# EAGLE board MOL-v1.1-2 (EAGLE 8.2.2)

Size 165.08 x 80.95 mm. Coordinates in mm from the lower left corner, seen from the top.
Outline: 0,0 165.08,0 165.08,80.95 0,80.95 0,0
Copper layers (1*16): Top 0.035559375mm / dielectric 1.501140625mm / Bottom 0.035559375mm
Design rules "typical_4pcb": minimum track width 10mil, minimum drill 15mil, track to track 6mil, track to pad 6mil, pad to pad 6mil, via to via 6mil, smd to smd 6mil, copper to edge 15mil, drill to drill 8mil, minimum pad ring 10mil, minimum via ring 8mil, stop-mask expansion 4mil, vias tented up to drill 0mil, thermal gap 10mil
Net classes: 2 Power: width 0.381 mm, clearance 0.279 mm; 3 Analog Sig: width 0.381 mm, clearance 0.279 mm

## Footprints (pad centres in the part's own frame; a part is rotated, then mirrored left to right if it is on the bottom)
1X03_NO_SILK = drill 1.016 pad 1.524: 1 0,0; 2 2.54,0; 3 5.08,0
1X02_LOCK = drill 1.016 pad 1.88: 1 -0.178,0; 2 2.718,0
1X04_LOCK = drill 1.016 pad 1.88 square: 1 0,0.127 | drill 1.016 pad 1.88: 2 2.54,-0.127; 3 5.08,0.127; 4 7.62,-0.127
DIL18 = drill 0.813 long: 1 -10.16,-3.81; 2 -7.62,-3.81; 3 -5.08,-3.81; 4 -2.54,-3.81; 5 0,-3.81; 6 2.54,-3.81; 7 5.08,-3.81; 8 7.62,-3.81; 9 10.16,-3.81; 10 10.16,3.81; 11 7.62,3.81; 12 5.08,3.81; 13 2.54,3.81; 14 0,3.81; 15 -2.54,3.81; 16 -5.08,3.81; 17 -7.62,3.81; 18 -10.16,3.81
SOT23-6 = smd 0.55 x 1.2: 1 -0.95,-1.3; 2 0,-1.3; 3 0.95,-1.3; 4 0.95,1.3; 5 0,1.3; 6 -0.95,1.3
1X03_LOCK@1 = drill 1.016 pad 1.88: 1 0,0.127; 2 2.54,-0.127; 3 5.08,0.127
1X05_LOCK = drill 1.016 pad 1.88: 1 0,0.127; 2 2.54,-0.127; 3 5.08,0.127; 4 7.62,-0.127; 5 10.16,0.127
TRIM-PCB-9MM = drill 0.9 pad 1.778: 1 -2.54,-7.5; 2 0,-7.5; 3 2.54,-7.5 | drill 2.845 pad 4: 5 -4.8,0; M2 4.8,0
SPRINGTERMINAL-2.54MM-4 = drill 1.1 pad 1.9: 1 7.62,-2.54; 2 5.08,-2.54; 3 2.54,-2.54; 4 0,-2.54; P$1 7.62,2.54; P$2 5.08,2.54; P$3 2.54,2.54; P$4 0,2.54
DCJACK_2MM_PTH = drill 2.8: GND 0,7.35; GNDBREAK 4.8,10.75 | drill 3.2: PWR 0,13.6
1/6W-RES = drill 0.762 pad 1.676: 1 -2.5,0; 2 2.5,0
RESISTOR-NET-8P-DIL16 = drill 0.813 pad 1.422: A1 -8.89,-3.81; A2 -8.89,3.81; B1 -6.35,-3.81; B2 -6.35,3.81; C1 -3.81,-3.81; C2 -3.81,3.81; D1 -1.27,-3.81; D2 -1.27,3.81; E1 1.27,-3.81; E2 1.27,3.81; F1 3.81,-3.81; F2 3.81,3.81; G1 6.35,-3.81; G2 6.35,3.81; H1 8.89,-3.81; H2 8.89,3.81
TR2-SWITCH-MOMENTARY-LED = drill 0.8 pad 1.676: 1 2.54,-2.54; 2 2.54,2.54; 3 -2.54,-2.54; 4 -2.54,2.54; A 0,2.54; C 0,-2.54
T36 = drill 1: 0 -15.24,-5.08; 1 -12.7,-5.08; 2 -10.16,-5.08; 3 -7.62,-5.08; 3V3(1) 17.78,-5.08; 3V3(2) 27.94,0; 3V3(3) -12.7,10.16; 3V3(4) 40.64,5.08; 4 -5.08,-5.08; 5 -2.54,-5.08; 5V -11.43,-1.905; 6 0,-5.08; 7 2.54,-5.08; 8 5.08,-5.08; 9 7.62,-5.08; 10 10.16,-5.08; 11 12.7,-5.08; 12 15.24,-5.08; 13 15.24,10.16; 14 12.7,10.16; 15 10.16,10.16; 16 7.62,10.16; 17 5.08,10.16; 18 2.54,10.16; 19 0,10.16; 20 -2.54,10.16; 21 -5.08,10.16; 22 -7.62,10.16; 23 -10.16,10.16; 24 20.32,-5.08; 25 22.86,-5.08; 26 25.4,-5.08; 27 27.94,-5.08; 28 30.48,-5.08; 29 33.02,-5.08; 30 35.56,-5.08; 31 38.1,-5.08; 32 40.64,-5.08; 33 40.64,10.16; 34 38.1,10.16; 35 35.56,10.16; 36 33.02,10.16; 37 30.48,10.16; 38 27.94,10.16; 39 25.4,10.16; 40 20.32,2.54; 41 22.86,2.54; 42 25.4,2.54; 43 30.48,2.54; 44 33.02,2.54; 45 35.56,2.54; 46 38.1,2.54; 47 38.1,5.08; 48 35.56,5.08; 49 33.02,5.08; 50 30.48,5.08; 51 25.4,5.08; 52 22.86,5.08; 53 20.32,5.08; 54 5.08,5.08; 55 2.54,5.08; 56 0,5.08; 57 -2.54,5.08; A10 -7.62,7.62; A11 -5.08,7.62; AGND -15.24,10.16; AREF -10.16,7.62; D+ -6.35,-1.905; D- -8.89,-1.905; DAC0 22.86,10.16; DAC1 20.32,10.16; DC 2.54,2.54; DD 5.08,2.54; DE 0,2.54; G1 27.94,2.54; G2 17.78,10.16; G3 40.64,2.54; G4 -3.81,-1.905; G5 -1.27,-1.905; G6 -2.54,2.54; P 27.94,5.08; R 27.94,7.62; VBAT 27.94,-2.54; VIN -17.78,10.16; VUSB -15.24,7.62 | drill 1 square: G0 -17.78,-5.08
POLOLU_TB6612FNG = drill 0.8 pad 1.778: AIN1 7.62,3.81; AIN2 7.62,6.35; AO1 -7.62,3.81; AO2 -7.62,1.27; BIN1 7.62,-1.27; BIN2 7.62,-3.81; BO1 -7.62,-3.81; BO2 -7.62,-1.27; GND -7.62,8.89; GND1 -7.62,-8.89; GND2 7.62,-8.89; PWMA 7.62,8.89; PWMB 7.62,-6.35; STBY 7.62,1.27; VCC -7.62,6.35; VMOT -7.62,-6.35

## Placement (x,y rotation side)
AN-IN-1  [1X03_NO_SILK]  11.05,77.34 0 top
AN-IN-2  [1X03_NO_SILK]  22.61,77.34 0 top
AN-IN-3  [1X03_NO_SILK]  34.04,77.34 0 top
AN-IN-4  [1X03_NO_SILK]  45.47,77.34 0 top
AN-IN-5  [1X03_NO_SILK]  64.39,77.34 0 top
AN-IN-6  [1X03_NO_SILK]  75.95,77.34 0 top
AN-IN-7  [1X03_NO_SILK]  87.38,77.34 0 top
AN-IN-8  [1X03_NO_SILK]  98.81,77.34 0 top
AN-IN-9  [1X03_NO_SILK]  179.96,77.34 0 top  (outside the outline)
AN-IN-10  [1X03_NO_SILK]  191.52,77.34 0 top  (outside the outline)
AN-IN-11  [1X03_NO_SILK]  202.95,77.34 0 top  (outside the outline)
AN-IN-12  [1X03_NO_SILK]  214.38,77.34 0 top  (outside the outline)
GND-SHRT  [1X02_LOCK]  156.08,17.78 270 bottom
I2C  [1X04_LOCK]  162.56,50.8 270 bottom
IC1  ULN2803  [DIL18]  16.51,27.94 0 bottom
IC2  ULN2803  [DIL18]  101.6,8.89 0 bottom
IC3  SN74LVC2G04DBV  [SOT23-6]  142.24,38.1 270 bottom
J1  SERVO 1  [1X03_LOCK@1]  153.67,21.59 90 top
J2  SERVO 2  [1X03_LOCK@1]  158.12,21.59 90 top
J3  SERVO 3  [1X03_LOCK@1]  162.56,21.59 90 top
J4  SERVO 1  [1X03_LOCK@1]  -1.27,-26.67 0 top  (outside the outline)
J5  SERVO 2  [1X03_LOCK@1]  -1.27,-45.72 0 top  (outside the outline)
JOY1  [1X05_LOCK]  2.54,62.23 90 top
JOY2  [1X05_LOCK]  162.56,72.39 270 top
KNOB1  [TRIM-PCB-9MM]  13.59,70.99 0 top
KNOB2  [TRIM-PCB-9MM]  25.15,61.21 0 top
KNOB3  [TRIM-PCB-9MM]  36.58,70.99 0 top
KNOB4  [TRIM-PCB-9MM]  48.01,61.21 0 top
KNOB5  [TRIM-PCB-9MM]  66.93,70.99 0 top
KNOB6  [TRIM-PCB-9MM]  78.49,61.21 0 top
KNOB7  [TRIM-PCB-9MM]  89.92,70.99 0 top
KNOB8  [TRIM-PCB-9MM]  101.35,61.21 0 top
KNOB9  [TRIM-PCB-9MM]  182.5,70.99 0 top  (outside the outline)
KNOB10  [TRIM-PCB-9MM]  194.06,61.21 0 top  (outside the outline)
KNOB11  [TRIM-PCB-9MM]  205.49,70.99 0 top  (outside the outline)
KNOB12  [TRIM-PCB-9MM]  216.92,61.21 0 top  (outside the outline)
MOTORS1  [SPRINGTERMINAL-2.54MM-4]  157.48,37.59 270 bottom
POWER-5V  [DCJACK_2MM_PTH]  167.64,7.62 270 bottom
R5  [1/6W-RES]  156.59,45.72 180 bottom
R6  [1/6W-RES]  156.59,43.31 180 bottom
RN1  330  [RESISTOR-NET-8P-DIL16]  40.64,27.94 0 bottom
RN2  330  [RESISTOR-NET-8P-DIL16]  102.87,20.32 0 bottom
S1  SW-LEDPTH  [TR2-SWITCH-MOMENTARY-LED]  13.59,45.72 0 top
S2  SW-LEDPTH  [TR2-SWITCH-MOMENTARY-LED]  25.4,45.72 0 top
S3  SW-LEDPTH  [TR2-SWITCH-MOMENTARY-LED]  36.83,45.72 0 top
S4  SW-LEDPTH  [TR2-SWITCH-MOMENTARY-LED]  48.26,45.72 0 top
S5  SW-LEDPTH  [TR2-SWITCH-MOMENTARY-LED]  66.93,45.72 0 top
S6  SW-LEDPTH  [TR2-SWITCH-MOMENTARY-LED]  78.74,45.72 0 top
S7  SW-LEDPTH  [TR2-SWITCH-MOMENTARY-LED]  90.17,45.72 0 top
S8  SW-LEDPTH  [TR2-SWITCH-MOMENTARY-LED]  101.6,45.72 0 top
S9  SW-LEDPTH  [TR2-SWITCH-MOMENTARY-LED]  182.5,45.72 0 top  (outside the outline)
S10  SW-LEDPTH  [TR2-SWITCH-MOMENTARY-LED]  194.31,45.72 0 top  (outside the outline)
S11  SW-LEDPTH  [TR2-SWITCH-MOMENTARY-LED]  205.74,45.72 0 top  (outside the outline)
S12  SW-LEDPTH  [TR2-SWITCH-MOMENTARY-LED]  217.17,45.72 0 top  (outside the outline)
TEENSY  TEENSY3_6--ALLPINS  [T36]  19.05,15.24 180 bottom
U$7  POLOLU_TB6612FNG  [POLOLU_TB6612FNG]  142.24,31.75 0 bottom
US1  SW-LEDPTH  [TR2-SWITCH-MOMENTARY-LED]  88.9,34.29 180 top
US2  SW-LEDPTH  [TR2-SWITCH-MOMENTARY-LED]  97.79,34.29 180 top
US3  SW-LEDPTH  [TR2-SWITCH-MOMENTARY-LED]  106.68,34.29 180 top
US4  SW-LEDPTH  [TR2-SWITCH-MOMENTARY-LED]  115.57,34.29 180 top
VIN  [1X02_LOCK]  163.7,17.78 270 bottom
VOUT  [1X02_LOCK]  161.16,17.78 270 bottom

## Library data of the parts
AN-IN-1-AN-IN-12 J1-J5 JOY1 JOY2 = SparkFun-Connectors
GND-SHRT I2C MOTORS1 RN1 RN2 U$7 VIN VOUT = CMU-ArtFab
IC1 IC2 = uln-udn
IC3 = 74LV
KNOB1-KNOB12 S1-S12 US1-US4 = Daniel
POWER-5V = adafruit
R5 R6 = SparkFun-Resistors
TEENSY = Teensy_3_6

## Nets
+3V3: AN-IN-1.1 AN-IN-2.1 AN-IN-3.1 AN-IN-4.1 AN-IN-5.1 AN-IN-6.1 AN-IN-7.1 AN-IN-8.1 AN-IN-9.1 AN-IN-10.1 AN-IN-11.1 AN-IN-12.1 I2C.1 IC3.5 JOY1.2 JOY2.2 KNOB1.1 KNOB2.1 KNOB3.1 KNOB4.1 KNOB5.1 KNOB6.1 KNOB7.1 KNOB8.1 KNOB9.1 KNOB10.1 KNOB11.1 KNOB12.1 R5.1 R6.1 TEENSY.3V3(1) TEENSY.3V3(2) TEENSY.3V3(3) TEENSY.3V3(4) U$7.STBY U$7.VCC
+5V [Power]: IC1.10 IC2.10 J1.2 J2.2 J3.2 J4.2 J5.2 POWER-5V.PWR VIN.1
AGND [Analog Sig]: AN-IN-1.3 AN-IN-2.3 AN-IN-3.3 AN-IN-4.3 AN-IN-5.3 AN-IN-6.3 AN-IN-7.3 AN-IN-8.3 AN-IN-9.3 AN-IN-10.3 AN-IN-11.3 AN-IN-12.3 JOY1.1 JOY2.1 KNOB1.3 KNOB2.3 KNOB3.3 KNOB4.3 KNOB5.3 KNOB6.3 KNOB7.3 KNOB8.3 KNOB9.3 KNOB10.3 KNOB11.3 KNOB12.3 TEENSY.AGND
AN1 [Analog Sig]: AN-IN-1.2 AN-IN-5.2 AN-IN-9.2 KNOB1.2 KNOB5.2 KNOB9.2 TEENSY.14
AN2 [Analog Sig]: AN-IN-2.2 AN-IN-6.2 AN-IN-10.2 KNOB2.2 KNOB6.2 KNOB10.2 TEENSY.15
AN3 [Analog Sig]: AN-IN-3.2 AN-IN-7.2 AN-IN-11.2 KNOB3.2 KNOB7.2 KNOB11.2 TEENSY.16
AN4 [Analog Sig]: AN-IN-4.2 AN-IN-8.2 AN-IN-12.2 KNOB4.2 KNOB8.2 KNOB12.2 TEENSY.33
AN5 [Analog Sig]: TEENSY.34
AN6 [Analog Sig]: TEENSY.35
AN7 [Analog Sig]: TEENSY.36
AN8 [Analog Sig]: TEENSY.39
AN9 [Analog Sig]: TEENSY.DAC0
AN10 [Analog Sig]: TEENSY.DAC1
AN11 [Analog Sig]: TEENSY.A10
AN12 [Analog Sig]: TEENSY.A11
B1: S1.1 S5.1 S9.1 TEENSY.11
B2: S2.1 S6.1 S10.1 TEENSY.12
B3: S3.1 S7.1 S11.1 TEENSY.24
B4: S4.1 S8.1 S12.1 TEENSY.25
B5: TEENSY.26
B6: TEENSY.27
B7: TEENSY.28
B8: TEENSY.42
B9: TEENSY.43
B10: TEENSY.44
B11: TEENSY.45
B12: TEENSY.46
GND: GND-SHRT.2 I2C.2 IC1.9 IC2.9 IC3.2 J1.1 J2.1 J3.1 J4.1 J5.1 S1.3 S2.3 S3.3 S4.3 S5.3 S6.3 S7.3 S8.3 S9.3 S10.3 S11.3 S12.3 TEENSY.G0 TEENSY.G1 TEENSY.G2 TEENSY.G3 TEENSY.G4 TEENSY.G5 TEENSY.G6 U$7.GND US1.3 US2.3 US3.3 US4.3 VIN.2 VOUT.2
GND_MOT [Power]: GND-SHRT.1 POWER-5V.GND U$7.GND1 U$7.GND2
GNDBREAK: POWER-5V.GNDBREAK
I2C_SCL: I2C.3 R5.2
I2C_SDA: I2C.4 R6.2
JOYB1: JOY1.5 TEENSY.1
JOYB2: JOY2.5 TEENSY.0
JOYH1 [Analog Sig]: JOY1.3 TEENSY.20
JOYH2 [Analog Sig]: JOY2.3 TEENSY.18
JOYV1 [Analog Sig]: JOY1.4 TEENSY.19
JOYV2 [Analog Sig]: JOY2.4 TEENSY.17
L1: IC1.8 TEENSY.2
L2: IC1.7 TEENSY.3
L3: IC1.6 TEENSY.4
L4: IC1.5 TEENSY.5
L5: IC1.4 TEENSY.6
L6: IC1.3 TEENSY.7
L7: IC1.2 TEENSY.8
L8: IC1.1 TEENSY.23
L9: IC2.8 TEENSY.29
L10: IC2.7 TEENSY.30
L11: IC2.6 TEENSY.31
L12: IC2.5 TEENSY.32
LED1: RN1.H2 S1.C S5.C S9.C
LED2: RN1.G2 S2.C S6.C S10.C
LED3: RN1.F2 S3.C S7.C S11.C
LED4: RN1.E2 S4.C S8.C S12.C
LED5: RN1.D2
LED6: RN1.C2
LED7: RN1.B2
LED8: RN1.A2
LED9: RN2.H2
LED10: RN2.G2
LED11: RN2.F2
LED12: RN2.E2
M_AIN: IC3.3 TEENSY.40 U$7.AIN1
M_BIN: IC3.1 TEENSY.41 U$7.BIN2
M_PWMA: TEENSY.21 U$7.PWMA
M_PWMB: TEENSY.22 U$7.PWMB
N$5: IC3.6 U$7.BIN1
N$6: IC3.4 U$7.AIN2
N$11: IC1.18 RN1.A1
N$12: IC1.17 RN1.B1
N$13: IC1.16 RN1.C1
N$14: IC1.15 RN1.D1
N$15: IC1.14 RN1.E1
N$16: IC1.13 RN1.F1
N$17: IC1.12 RN1.G1
N$18: IC1.11 RN1.H1
N$19: IC2.18 RN2.A1
N$20: IC2.17 RN2.B1
N$21: IC2.16 RN2.C1
N$22: IC2.15 RN2.D1
N$23: IC2.14 RN2.E1
N$24: IC2.12 RN2.G1
N$25: IC2.11 RN2.H1
N$26: IC2.13 RN2.F1
N$45 [Power]: MOTORS1.P$1 U$7.BO1
N$46 [Power]: MOTORS1.P$2 U$7.BO2
N$52 [Power]: MOTORS1.P$3 U$7.AO2
N$54 [Power]: MOTORS1.P$4 U$7.AO1
RX6: TEENSY.47
S1: J1.3 J4.3 TEENSY.9
S2: J2.3 J5.3 TEENSY.10
S3: J3.3 TEENSY.49
TX6: TEENSY.48
UB1: TEENSY.57 US1.1
UB2: TEENSY.56 US2.1
UB3: TEENSY.55 US3.1
UB4: TEENSY.54 US4.1
UL1: IC2.4 TEENSY.53
UL2: IC2.3 TEENSY.52
UL3: IC2.2 TEENSY.51
UL4: IC2.1 TEENSY.50
ULED1: RN2.D2 US1.C
ULED2: RN2.C2 US2.C
ULED3: RN2.B2 US3.C
ULED4: RN2.A2 US4.C
V+: S1.A S2.A S3.A S4.A S5.A S6.A S7.A S8.A S9.A S10.A S11.A S12.A US1.A US2.A US3.A US4.A
VMOT [Power]: U$7.VMOT VOUT.1

## Tracks (layer width: path | path; a pad name or v marks a point on that pad's centre or on a via)
+3V3  (35 unrouted)
+5V  (8 unrouted)
AGND  (26 unrouted)
AN1  (6 unrouted)
AN2  (6 unrouted)
AN3  (6 unrouted)
AN4  (6 unrouted)
B1  (3 unrouted)
B2  (3 unrouted)
B3  (3 unrouted)
B4  (3 unrouted)
GND  (35 unrouted)
GND_MOT  (3 unrouted)
I2C_SCL  (1 unrouted)
I2C_SDA  (1 unrouted)
JOYB1  (1 unrouted)
JOYB2  (1 unrouted)
JOYH1  (1 unrouted)
JOYH2  (1 unrouted)
JOYV1  (1 unrouted)
JOYV2  (1 unrouted)
L1  (1 unrouted)
L2  (1 unrouted)
L3  (1 unrouted)
L4  (1 unrouted)
L5  (1 unrouted)
L6  (1 unrouted)
L7  (1 unrouted)
L8  (1 unrouted)
L9  (1 unrouted)
L10  (1 unrouted)
L11  (1 unrouted)
L12  (1 unrouted)
LED1  (3 unrouted)
LED2  (3 unrouted)
LED3  (3 unrouted)
LED4  (3 unrouted)
M_AIN  (2 unrouted)
M_BIN  (2 unrouted)
M_PWMA  (1 unrouted)
M_PWMB  (1 unrouted)
N$5  (1 unrouted)
N$6  (1 unrouted)
N$11  (1 unrouted)
N$12  (1 unrouted)
N$13  (1 unrouted)
N$14  (1 unrouted)
N$15  (1 unrouted)
N$16  (1 unrouted)
N$17  (1 unrouted)
N$18  (1 unrouted)
N$19  (1 unrouted)
N$20  (1 unrouted)
N$21  (1 unrouted)
N$22  (1 unrouted)
N$23  (1 unrouted)
N$24  (1 unrouted)
N$25  (1 unrouted)
N$26  (1 unrouted)
N$45  (1 unrouted)
N$46  (1 unrouted)
N$52  (1 unrouted)
N$54  (1 unrouted)
S1  (2 unrouted)
S2  (2 unrouted)
S3  (1 unrouted)
UB1  (1 unrouted)
UB2  (1 unrouted)
UB3  (1 unrouted)
UB4  (1 unrouted)
UL1  (1 unrouted)
UL2  (1 unrouted)
UL3  (1 unrouted)
UL4  (1 unrouted)
ULED1  (1 unrouted)
ULED2  (1 unrouted)
ULED3  (1 unrouted)
ULED4  (1 unrouted)
V+  (15 unrouted)
VMOT  (1 unrouted)